# Altium PCB usomiq-audio-cape.PcbDoc
Units mm, origin at the board's own origin, x right, y up, seen from the top; angles counter-clockwise.
Board outline 54.61 x 86.36 mm, 2 copper layers (Top Layer, Bottom Layer); 57 components, 43 nets, 265 pads, 69 vias.
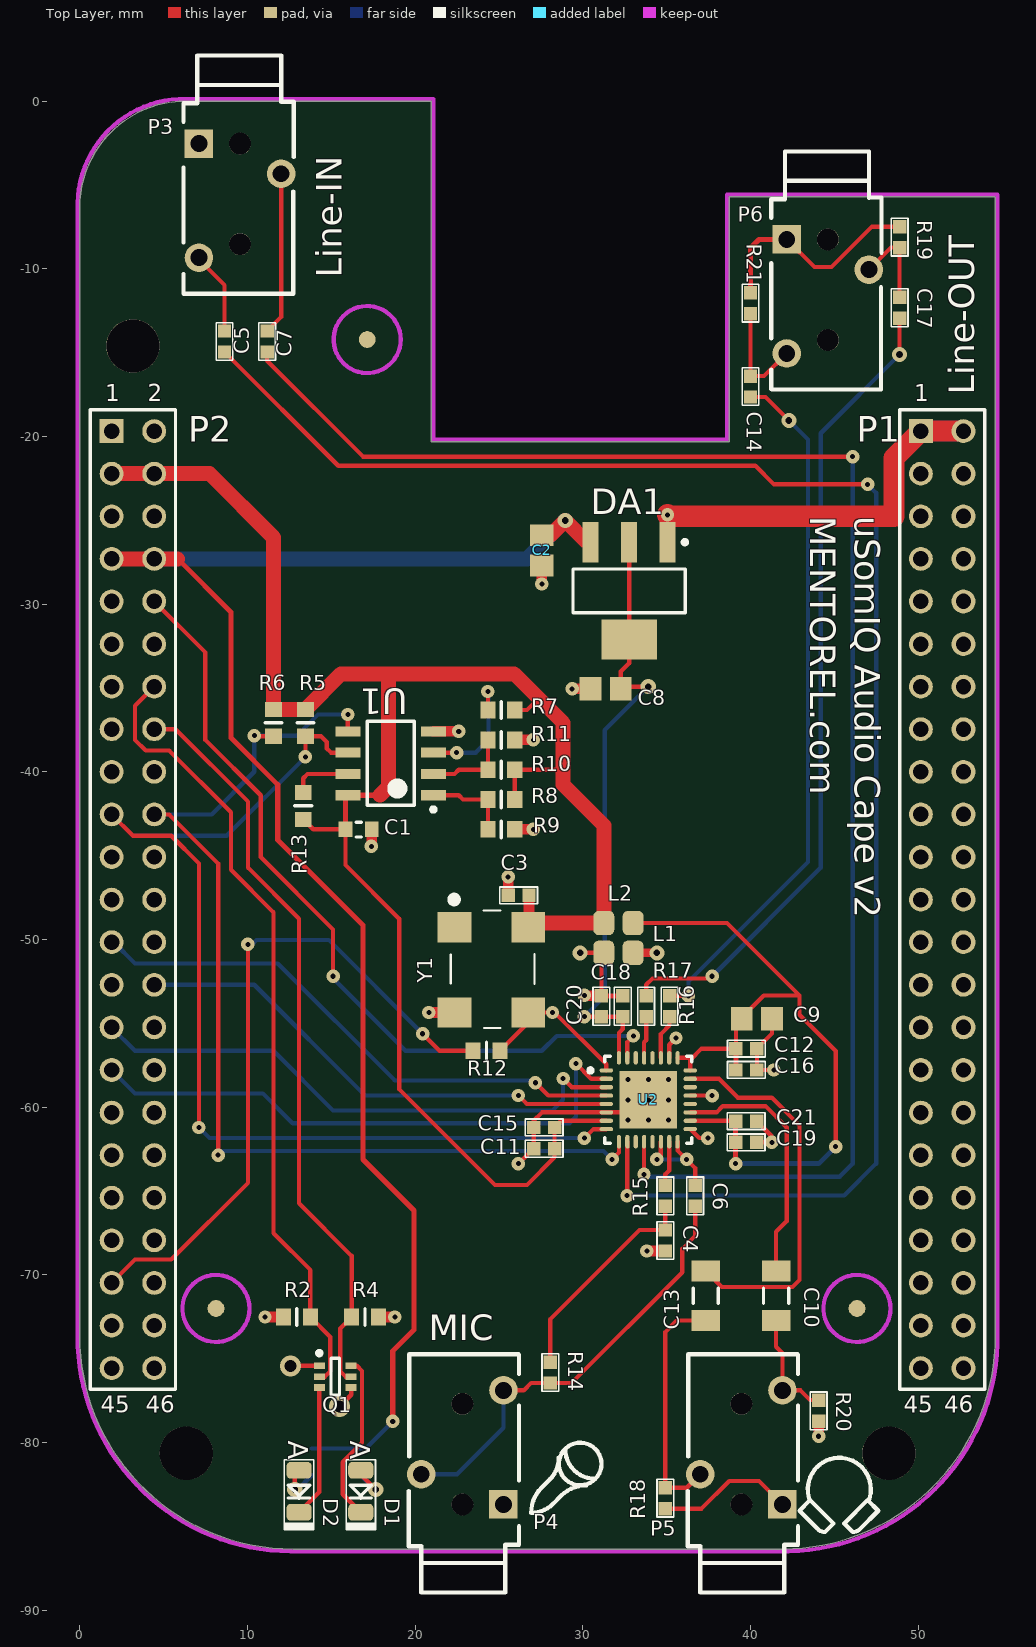
[diagram p0: Top Layer view]
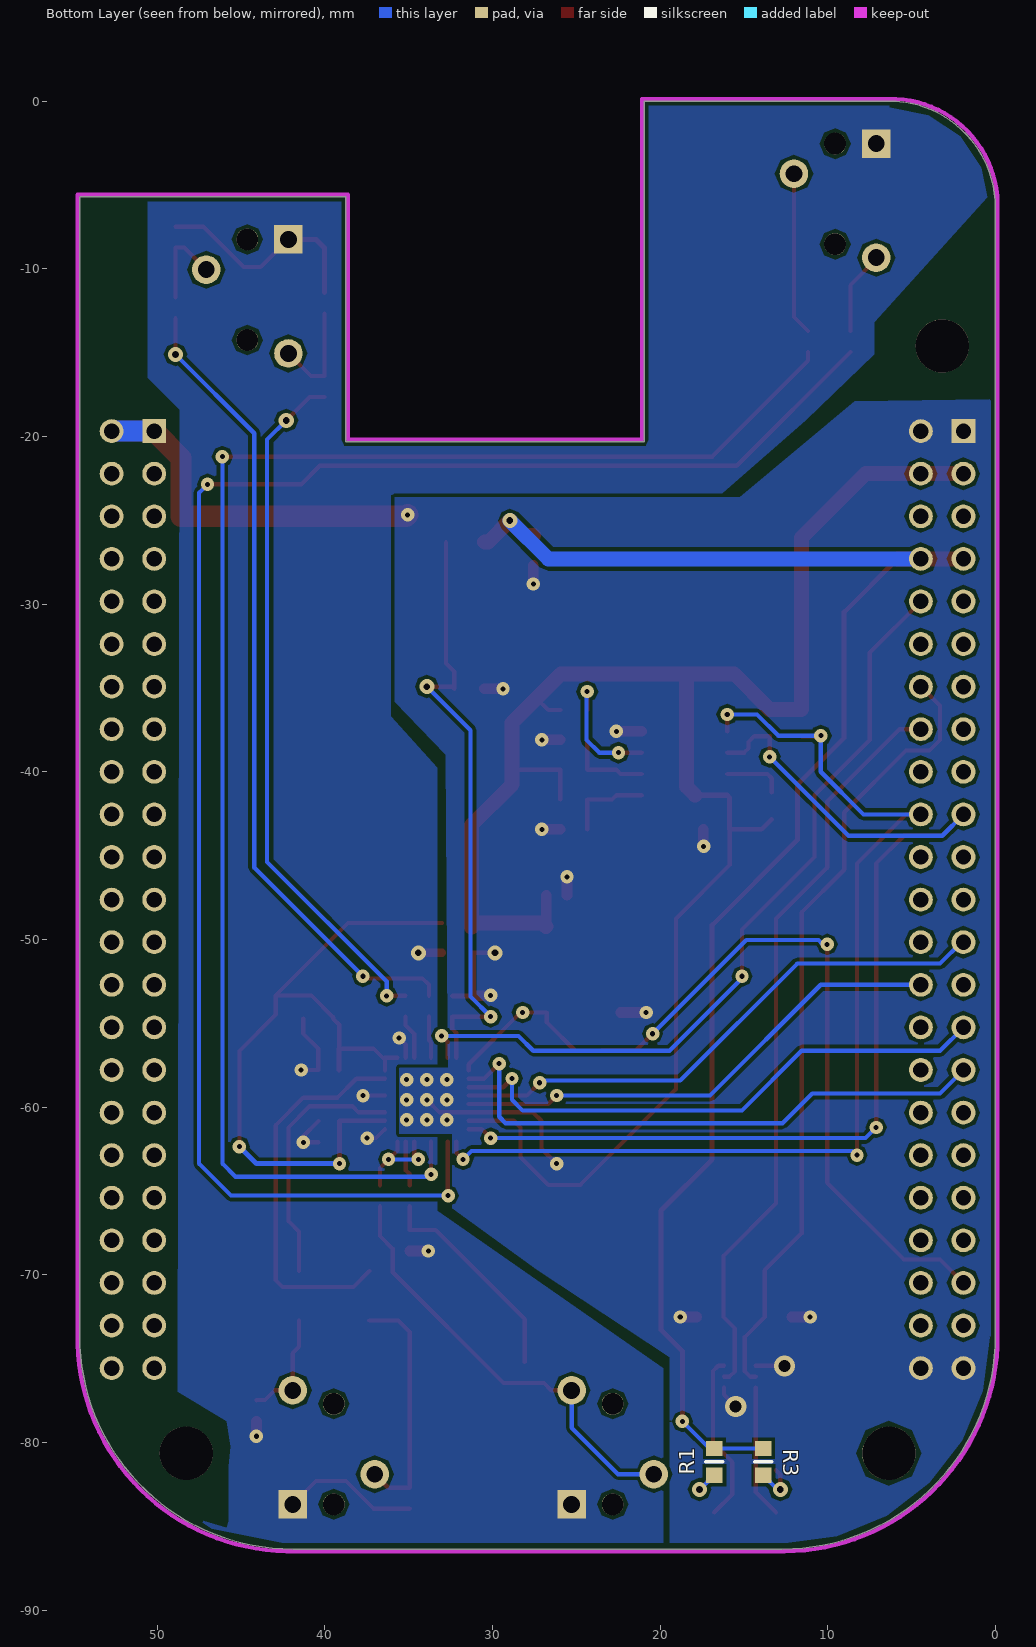
[diagram p1: Bottom Layer view, seen from below]
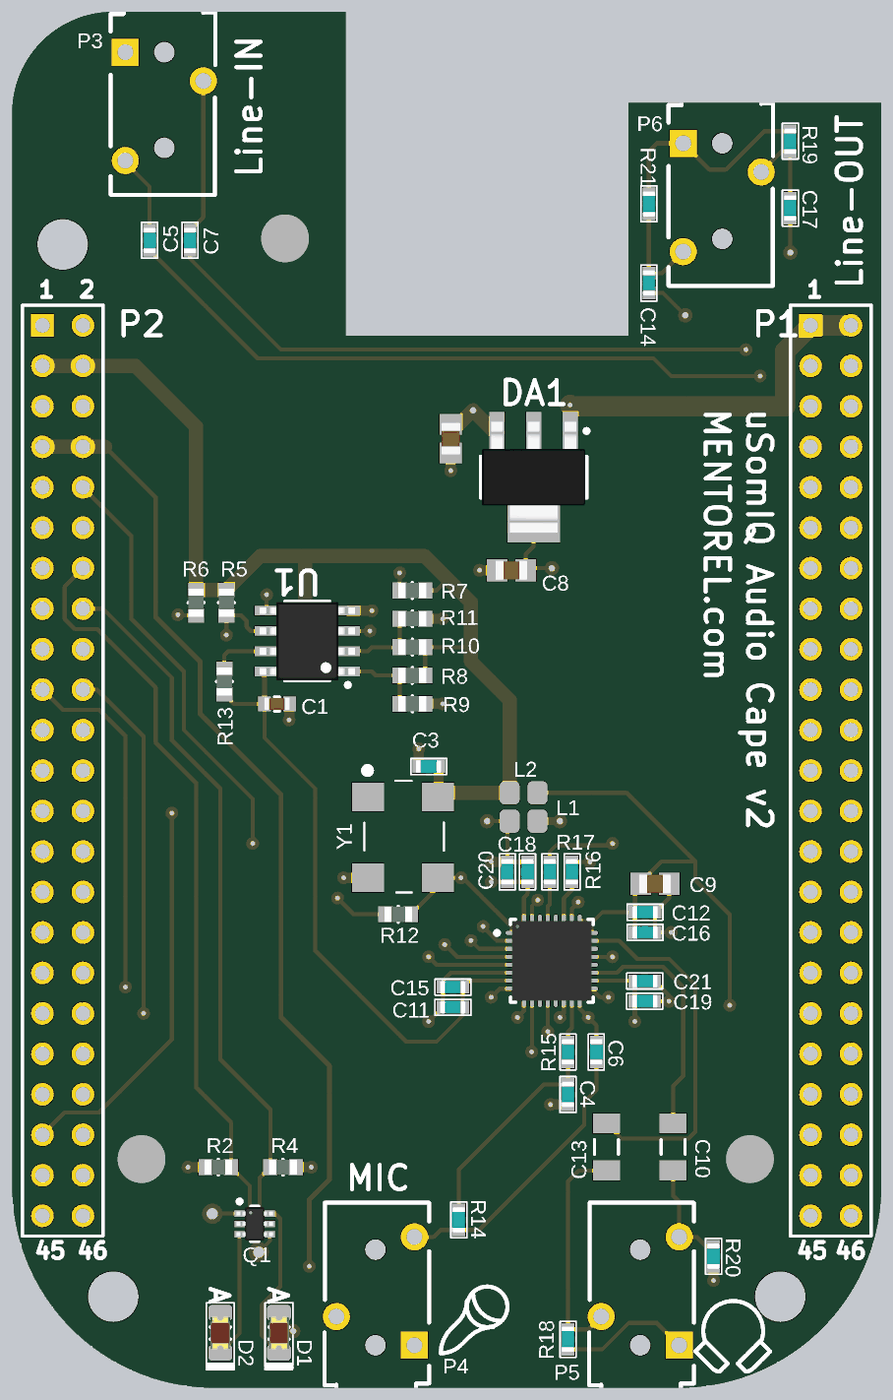
[diagram p2: 3D render of the assembled board from above, using the file's embedded part models]

## Layer stack, top to bottom
Top Layer: signal copper 0.0356
Dielectric: dielectric 0.32, FR-4, Dk 4.8
Bottom Layer: signal copper 0.0356

## Board outline
12.7,-86.36 cw(c12.7,-73.66) 0,-73.66 0,-6.35 cw(c6.35,-6.35) 6.35,0 20.955,0 20.955,-20.32 38.735,-20.32 38.735,-5.715 54.61,-5.715 54.61,-73.66 cw(c41.91,-73.66) 41.91,-86.36

## Design rules (kind name [scope] priority, off if disabled: settings)
Clearance Clearance_1 [InPolygon vs OnLayer('Keep-Out Layer')] p1: gap=0.25
Clearance [All] p2: gap=0.2
HoleSize [All] p1: absolutevalues=TRUE maxlimit=12.54 minlimit=0.025 maxpercent=80.000 minpercent=20.000
MinimumSolderMaskSliver [All] p1: minsoldermaskwidth=0
PlaneClearance [All] p1: clearance=0.254
PlaneConnect [All] p1: planeconnectstyle=Direct reliefexpansion=0.508 reliefentries=4 reliefconductorwidth=0.254 reliefairgap=0.254
PolygonConnect [All] p1: connectstyle=Direct reliefconductorwidth=0.254 reliefentries=4 polygonreliefangle="90 Angle" airgapwidth=0.254
RoutingVias [All] p1: holewidth=0.3 width=0.8 viastyle="Through Hole" minholewidth=0.3 minwidth=0.61 maxholewidth=0.711 maxwidth=1.27
SilkToSilkClearance [All] p1: silktosilkclearance=0.05
SilkscreenOverComponentPads [IsPad] p1: minsilkscreentomaskgap=0.01
SolderMaskExpansion [All] p1: expansion=0.05
Width [All] p1: maxlimit=1.27 minlimit=0.254 preferedwidth=0.254
22 further rules are at their usual default settings.

## Classes and differential pairs
component class bone_capes: C1 D1 D2 P1 P2 Q1 R1 R2 R3 R4 R5 R6 R7 R8 R9 R10 R11 R12 R13 U1
component class audio: C2 C3 C4 C5 C6 C7 C8 C9 C10 C11 C12 C13 C14 C15 C16 C17 C18 C19 C20 C21 DA1 L1 L2 P3 P4 P5 P6 R14 R15 R16 R17 R18 R19 R20 R21 U2 Y1

## Components (designator, comment, footprint, x,y, rotation, side; value= is the part's Value field where it differs from the comment)
C1 "C0603" CC1608-0603 16.637,-43.434 r0 top
C2 "C0805" CC2012-0805 27.559,-26.797 r90 top
C3 "C0603" CHIP0603 26.797,-47.371 r180 top
C4 "C0603" CHIP0603 34.925,-68.58 r90 top
C5 "C0603" CHIP0603 8.636,-13.716 r270 top
C6 "C0603" CHIP0603 36.703,-65.913 r90 top
C7 "C0603" CHIP0603 11.176,-13.716 r270 top
C8 "C0805" CC2012-0805 31.369,-35.052 r0 top
C9 "C0805" CC2012-0805 40.386,-54.737 r180 top
C10 "C1206" CC3216-1206 41.529,-71.247 r90 top
C11 "C0603" CHIP0603 28.321,-62.484 r180 top
C12 "C0603" CHIP0603 39.136,-56.515 r0 top
C13 "C1206" CC3216-1206 37.338,-71.247 r90 top
C14 "C0603" CHIP0603 40.005,-17.653 r90 top
C15 "C0603" CHIP0603 28.321,-61.214 r180 top
C16 "C0603" CHIP0603 39.136,-57.785 r0 top
C17 "C0603" CHIP0603 48.895,-12.954 r90 top
C18 "C0603" CHIP0603 32.385,-54.61 r90 top
C19 "C0603" CHIP0603 39.116,-62.103 r0 top
C20 "C0603" CHIP0603 31.115,-54.61 r90 top
C21 "C0603" CHIP0603 39.116,-60.833 r0 top
D1 "LED0805" LED0805 16.764,-81.661 r270 top
D2 "LED0805" LED0805 13.081,-81.661 r270 top
DA1 "LM1117" SOT230P700X160-4N 32.766,-29.21 r270 top
L1 "BLM21PG221SN1D" Chip2PinSM127P600-8N 32.131,-50.8 r0 top
L2 "BLM21PG221SN1D" Chip2PinSM127P600-8N 32.131,-49.022 r0 top
P1 "HDR_46_F_2_0.1_0.1" DIP46 50.165,-19.685 r0 top
P2 "HDR_46_F_2_0.1_0.1" DIP46 1.905,-19.685 r0 top
P3 "AUB-13" AUB_13 7.112,-2.54 r90 top
P4 "AUB-13" AUB_13 25.273,-83.693 r270 top
P5 "AUB-13" AUB_13 41.91,-83.693 r270 top
P6 "AUB-13" AUB_13 42.164,-8.255 r90 top
Q1 "RN1907" SOT363-6L 15.24,-76.073 r0 top
R1 "R0603" RESC1608X55N 16.764,-81.153 r90 bottom
R2 "R0603" RESC1608X55N 12.954,-72.517 r0 top
R3 "R0603" RESC1608X55N 13.843,-81.153 r90 bottom
R4 "R0603" RESC1608X55N 17.018,-72.517 r180 top
R5 "R0603" RESC1608X55N 13.462,-37.084 r90 top
R6 "R0603" RESC1608X55N 11.557,-37.084 r90 top
R7 "R0603" RESC1608X55N 25.146,-36.322 r0 top
R8 "R0603" RESC1608X55N 25.146,-41.656 r0 top
R9 "R0603" RESC1608X55N 25.146,-43.434 r180 top
R10 "R0603" RESC1608X55N 25.146,-39.878 r0 top
R11 "R0603" RESC1608X55N 25.146,-38.1 r180 top
R12 "R0603" RESC1608X55N 24.257,-56.642 r180 top
R13 "R0603" RESC1608X55N 13.335,-42.037 r270 top
R14 "R0603" CHIP0603 28.067,-76.454 r90 top
R15 "R0603" CHIP0603 34.925,-65.913 r90 top
R16 "R0603" CHIP0603 35.179,-54.61 r90 top
R17 "R0603" CHIP0603 33.782,-54.61 r90 top
R18 "R0603" CHIP0603 34.925,-83.947 r90 top
R19 "R0603" CHIP0603 48.895,-7.493 r270 top
R20 "R0603" CHIP0603 44.069,-78.74 r90 top
R21 "R0603" CHIP0603 40.005,-11.43 r270 top
U1 "CAT24C256" SOIC127P600X173-8L 18.542,-39.497 r180 top
U2 "TLV320AIC3104" QFN32 33.909,-59.563 r0 top
Y1 "KXO-V97" KXO_V97 22.352,-49.276 r270 top

## Footprints (in the part's own frame and the unit in brackets; to place one, negate y for a bottom-side part, rotate by r counter-clockwise, add the part's x,y. Pads: shape width x height; smd on the part's side, far side on the other; paste and mask are expansions set on the pad)
AUB_13 [mm] "3.5mm audio jack, PTH on pcb, 3 contacts"
  round 1.3 hole 1.3 unplated: 0(-6,-2.45) 0(0,-2.45)
  rect 1.7x1.7 hole 1: 1(0,0)
  round 1.7 hole 1: 2(-1.8,-4.9) 3(-6.8,0)
  silkscreen extent -8.95,-5.65 5.25,0.92, body extent -8.72,-5.38 5.2,0.6, height 5
CC1608-0603 [mil] "Chip Capacitor, 2-Leads, Body 1,6x0,8mm, IPC Medium Density"
  rect 32x36 smd: 1(-31,0) 2(31,0)
  silkscreen extent -6,-18 6,17, body extent -31,-16 32,16, height 31
CC2012-0805 [mm] "Chip Capacitor, 2-Leads, Body 2,0x1,25mm, IPC Medium Density"
  rect 1.3x1.4 smd: 1(-0.9,0) 2(0.9,0)
  body extent -1,-0.6 1,0.6, height 1.2
CC3216-1206 [mm] "Chip Capacitor, 2-Leads, Body 3,2x1,6mm, IPC Medium Density"
  rect 1.25x1.7 smd: 1(-1.475,0) 2(1.475,0)
  silkscreen extent -0.45,-0.75 0.45,0.75, body extent -1.7,-0.82 1.7,0.82, height 0.7
Chip2PinSM127P600-8N [mm]
  rrect50% 1.25x1.45 smd: 1(-0.875,0) 2(0.875,0)
  body extent -1.1,-0.72 1.1,0.72, height 1.05
CHIP0603 [mm]
  rect 0.8x0.8 smd: 1(0,0) 2(1.25,0)
  silkscreen extent -0.5,-0.5 1.75,0.5, body extent -0.53,-0.5 1.75,0.51, height 0.95
DIP46 [mm]
  rect 1.42x1.42 hole 0.92: 1(0,0)
  round 1.42 hole 0.92: 2(2.54,0) 3(0,-2.54) 4(2.54,-2.54) 5(0,-5.08) 6(2.54,-5.08) 7(0,-7.62) 8(2.54,-7.62) 9(0,-10.16) 10(2.54,-10.16) 11(0,-12.7) 12(2.54,-12.7) 13(0,-15.24) 14(2.54,-15.24) 15(0,-17.78) 16(2.54,-17.78) 17(0,-20.32) 18(2.54,-20.32) 19(0,-22.86) 20(2.54,-22.86) 21(0,-25.4) 22(2.54,-25.4) 23(0,-27.94) 24(2.54,-27.94) 25(0,-30.48) 26(2.54,-30.48) 27(0,-33.02) 28(2.54,-33.02) 29(0,-35.56) 30(2.54,-35.56) 31(0,-38.1) 32(2.54,-38.1) 33(0,-40.64) 34(2.54,-40.64) 35(0,-43.18) 36(2.54,-43.18) 37(0,-45.72) 38(2.54,-45.72) 39(0,-48.26) 40(2.54,-48.26) 41(0,-50.8) 42(2.54,-50.8) 43(0,-53.34) 44(2.54,-53.34) 45(0,-55.88) 46(2.54,-55.88)
  silkscreen extent -1.27,-57.15 3.81,1.27, body extent -1.27,-57.15 3.81,1.27, height 8.51
KXO_V97 [mm]
  rect 1.8x2 smd: 1(0,0) 2(5.08,0) 3(5.08,4.4) 4(0,4.4)
  silkscreen extent -1.86,-0.23 6,4.77, body extent -1,-0.22 6,4.78, height 1.3
LED0805 [mm]
  rrect50% 1x1.5 smd: 1(0,0) 2(2.5,0)
  silkscreen extent -0.63,-0.87 3.55,0.87, body extent -0.64,-0.89 3.17,0.89, height 1.1
QFN32 [mm] "32-Pin Quad Flat No-Lead 0.5 mm Pitch, IPC Medium Density"
  oval 0.8x0.25 smd: 1(-2.5,1.75) 2(-2.5,1.25) 3(-2.5,0.75) 4(-2.5,0.25) 5(-2.5,-0.25) 6(-2.5,-0.75) 7(-2.5,-1.25) 8(-2.5,-1.75) 17(2.5,-1.75) 18(2.5,-1.25) 19(2.5,-0.75) 20(2.5,-0.25) 21(2.5,0.25) 22(2.5,0.75) 23(2.5,1.25) 24(2.5,1.75)
  oval 0.25x0.8 smd: 9(-1.75,-2.5) 10(-1.25,-2.5) 11(-0.75,-2.5) 12(-0.25,-2.5) 13(0.25,-2.5) 14(0.75,-2.5) 15(1.25,-2.5) 16(1.75,-2.5) 25(1.75,2.5) 26(1.25,2.5) 27(0.75,2.5) 28(0.25,2.5) 29(-0.25,2.5) 30(-0.75,2.5) 31(-1.25,2.5) 32(-1.75,2.5)
  rect 3.45x3.45 smd: 33(0,0)
  silkscreen extent -3.57,-2.6 2.6,2.6, body extent -2.51,-2.51 2.51,2.51, height 0.8
RESC1608X55N [mm] "Chip Resistor, EIA 0603, Metric 1608, Body 1.6x0.8mm, IPC Medium Density"
  rect 0.9x1 smd: 1(-0.8,0) 2(0.8,0)
  silkscreen extent 0,-0.5 0,0.5, body extent -0.87,-0.47 0.88,0.48, height 0.55
SOIC127P600X173-8L [mm] "SOIC, 8-Leads, Body 5,0x4,0mm (max), Pitch 1,27mm, IPC High Density"
  rect 1.5x0.6 smd: 1(-2.55,1.905) 2(-2.55,0.635) 3(-2.55,-0.635) 4(-2.55,-1.905) 5(2.55,-1.905) 6(2.55,-0.635) 7(2.55,0.635) 8(2.55,1.905)
  silkscreen extent -2.68,-2.5 1.4,2.88, body extent -3,-2.49 3,2.49, height 1.75
SOT230P700X160-4N [mm] "SOT223, 4-Leads, Body 6,7x7,3mm (max), Pitch 2,30mm, IPC Medium Density"
  rect 2.4x0.95 smd: 1(-2.9,2.3) 2(-2.9,0) 3(-2.9,-2.3)
  rect 2.4x3.3 smd: 4(2.9,0)
  silkscreen extent -3.02,-3.35 1.3,3.45, body extent -3.48,-3.35 3.48,3.35, height 1.7
SOT363-6L [mm] "SOT363, 6-Leads, Body 2x1.3mm, Pitch 0.65mm, Lead Span 2.1mm, IPC High Density"
  rect 0.65x0.4 smd: 1(-0.95,0.65) 2(-0.95,0) 3(-0.95,-0.65) 4(0.95,-0.65) 5(0.95,0) 6(0.95,0.65)
  silkscreen extent -1.07,-1.1 0.25,1.52, body extent -1.15,-1.1 1.15,1.1, height 1

## Part data
C3 C4 C5 C6 C7 C11 C12 C14 C15 C16 C17 C18 C19 C20 C21: "Ceramic capacitor C0603"
D1 D2: "LED 0805"
DA1: "800mA Low-Dropout Linear Regulator"
P1 P2: "NN HEADER FMAL 46PS.1\" DL GOLD"
P3 P4 P5 P6: "Audio connector mini-jack 3.5mm, 3 pins"
Q1: "Transistor Silicon NPN"
R14 R15 R16 R17 R18 R19 R20 R21: "Resistor 0603"
U1: "256 kb I2C CMOS Serial  EEPROM"
U2: "LOW-POWER STEREO AUDIO CODEC FOR PORTABLE AUDIO/TELEPHONY"
Y1: "Quartz oscillator 7x5mm"

## Free pads (board coordinates)
  round 3.175 hole 3.175 unplated: 0(3.175,-14.605) 0(6.35,-80.645) 0(48.26,-80.645)
  round 1 smd paste+1: GF(8.128,-72.009) GF(17.145,-14.224) GF(46.355,-72.009)

## Via types
v1: diameter 0.8, hole 0.3, Top Layer to Bottom Layer, tented both sides, 59 vias
v2: diameter 0.9, hole 0.4, Top Layer to Bottom Layer, tented both sides, 8 vias
v3: diameter 1.27, hole 0.711, Top Layer to Bottom Layer, tented both sides, 2 vias

## Nets (pads, with @x,y where several pads share a name; then routed paths per layer and width w, separated by ;. In a path a pad name is that pad's centre, name@x,y a point inside that pad or via, vN(x,y) a via of type N, cw(c..) or ccw(c..) an arc to the next point about the centre after c; other vN are vias at no path point)
5VDC: C2.2 DA1.3 P2.7 P2.8 R1.2 R3.2 | length 96.5
  Top Layer w0.3: 5.842,-27.305 9.017,-30.48 9.017,-37.973 11.811,-40.767 11.811,-44.069 16.891,-49.149 16.891,-63.119 19.939,-66.167 19.939,-73.279 18.669,-74.549 v1(18.669,-78.74)
  Top Layer w0.889: P2.7 P2.8 5.842,-27.305 ; C2.2 28.078,-25.897 v2(28.956,-25.019) 30.247,-26.31 DA1.3
  Bottom Layer w0.254: R3.2 R1.2 17.056,-80.353 v1(18.669,-78.74)
  Bottom Layer w0.889: P2.8 26.67,-27.305 v2(28.956,-25.019)
AGND: C4.1 C9.1 C12.2 C16.2 C19.2 C21.2 L1.2 P3.1 P4.1 P5.1 P6.1 R18.1 R19.1 R20.1 R21.1 U2.17 U2.21 U2.26 | length 36
  Top Layer w0.254: R18.1 37.084,-83.947 38.735,-82.296 40.513,-82.296 P5.1 ; U2.26 35.159,-56.281 v1(35.56,-55.88) ; U2.17 36.945,-61.849 v1(37.465,-61.849) ; U2.21 v1(37.715,-59.313) ; C19.2 v1(41.275,-62.103) 41.275,-61.742 C21.2 ; C9.1 41.286,-55.615 C12.2 C16.2 v1(41.402,-57.785) ; P6.1 43.815,-9.906 44.831,-9.906 47.244,-7.493 R19.1
  Top Layer w0.3: R21.1 40.005,-8.763 40.513,-8.255 P6.1
  Top Layer w0.5: L1.2 v2(34.417,-50.8)
  Top Layer w0.635: v1(33.82,-68.58) C4.1 ; v1(44.069,-79.629) R20.1
AIC_1V8: C8.2 C18.1 C20.1 DA1.2 DA1.4 U2.32 | length 36.7
  Top Layer w0.254: v1(30.099,-54.61) C20.1 C18.1 32.385,-55.346 32.159,-55.572 U2.32 ; DA1.2 DA1.4 32.766,-33.528 32.269,-34.025 C8.2 32.396,-34.925 v2(33.909,-34.925)
  Bottom Layer w0.254: v1(30.099,-54.61) 31.305,-53.404 31.305,-37.529 v2(33.909,-34.925)
AUD_BCLK: P2.31 U2.2 | length 34.5
  Top Layer w0.254: v1(29.591,-57.404) 30.5,-58.313 U2.2
  Bottom Layer w0.254: P2.31 3.302,-59.182 10.922,-59.182 12.7,-60.96 29.21,-60.96 29.591,-60.579 v1(29.591,-57.404)
AUD_DIN: P2.25 U2.4 | length 33.2
  Top Layer w0.254: v1(27.178,-58.547) 27.944,-59.313 U2.4
  Bottom Layer w0.254: P2.25 2.032,-50.165 3.302,-51.435 11.811,-51.435 18.796,-58.42 v1@27.178,-58.42
AUD_DOUT: P2.28 U2.5 | length 29.9
  Top Layer w0.254: v1(26.162,-59.309) 26.666,-59.813 U2.5
  Bottom Layer w0.254: P2.28 10.414,-52.705 17.018,-59.309 v1(26.162,-59.309)
AUD_FSX: P2.29 U2.3 | length 33.2
  Top Layer w0.254: v1@28.892,-58.356 29.349,-58.813 U2.3
  Bottom Layer w0.254: P2.29 3.302,-56.642 11.557,-56.642 15.113,-60.198 28.194,-60.198 28.829,-59.563 v1(28.829,-58.293)
AUD_MCLK: R12.1 U2.1 Y1.3 | length 9.3
  Top Layer w0.254: R12.1 26.752,-54.947 Y1.3 v1(28.194,-54.356) 28.321,-54.356 31.409,-57.444 U2.1
AVDD: C9.2 C12.1 C16.1 C19.1 C21.1 L2.2 U2.18 U2.24 U2.25 | length 44.9
  Top Layer w0.254: L2.2 38.608,-49.022 42.926,-53.34 ; U2.25 36.409,-57.063 ; U2.18 39.096,-60.813 C21.1 ; U2.24 36.409,-57.19 37.084,-56.515 C12.1 39.136,-55.087 C9.2 39.486,-54.648 40.794,-53.34 42.926,-53.34 ; v1(45.085,-62.357) 45.085,-56.647 42.926,-54.488 42.926,-53.34
  Top Layer w0.3: v1(39.116,-63.373) C19.1 C21.1 ; C16.1 C12.1
  Bottom Layer w0.3: v1(39.116,-63.373) 44.069,-63.373 v1(45.085,-62.357)
DGND: C1.2 C2.1 C3.2 C8.1 C11.2 C15.2 C18.2 C20.2 DA1.1 L1.1 P1.1 P1.2 P2.1 P2.2 P2.45 P2.46 Q1.1 Q1.4 R2.1 R4.1 R9.1 R11.1 U1.4 U2.6 U2.33 Y1.2 | length 55.7
  Top Layer w0.254: v3(12.573,-75.438) 12.588,-75.423 Q1.1 ; v3(15.494,-77.851) 16.19,-77.155 Q1.4 ; v1(26.162,-63.373) 26.182,-63.373 C11.2 C15.2 27.071,-60.813 27.571,-60.313 U2.6 33.159,-60.313 v1(33.909,-59.563) ; v2(29.845,-50.8) L1.1 31.115,-50.941 C20.2
  Top Layer w0.3: C20.2 C18.2
  Top Layer w0.635: v1(11.049,-72.517) R2.1 ; v1@17.424,-44.361 C1.2 ; R4.1 v1(18.796,-72.517) ; v1(20.828,-54.356) Y1.2 ; U1.4 v1(22.606,-37.592) ; C3.2 v1(25.547,-46.266) ; R9.1 v1(27.051,-43.434) ; R11.1 v1(27.051,-38.1) ; v1(27.559,-28.802) C2.1 ; v1(29.364,-35.052) C8.1 ; v1@30.119,-53.36 C20.2
  Top Layer w1.27: v1(35.052,-24.676) 35.141,-24.765 48.566,-24.765 48.566,-21.284 P1.1 P1.2
  Bottom Layer w1.27: P1.1 P1.2
  other v1: 32.709,-60.763 33.909,-60.763 35.109,-60.763 32.709,-59.563 35.109,-59.563 32.709,-58.363 33.909,-58.363 35.109,-58.363 30.099,-53.34 17.399,-44.45
HPLO: C10.2 U2.19 | length 15.3
  Top Layer w0.254: U2.19 37.985,-60.313 38.354,-59.944 40.894,-59.944 42.164,-61.214 42.164,-66.802 41.529,-67.437 C10.2
HPLOUT: C10.1 P5.3 R20.2 | length 6.7
  Top Layer w0.254: C10.1 41.529,-74.295 41.91,-74.676 P5.3 42.984,-76.893 43.561,-77.47 44.049,-77.47 R20.2
HPRO: C13.2 U2.23 | length 23
  Top Layer w0.254: U2.23 38.12,-58.313 39.243,-59.436 41.275,-59.436 42.926,-61.087 42.926,-70.312 42.514,-70.724 38.29,-70.724 C13.2
HPROUT: C13.1 P5.2 R18.2 | length 14.4
  Top Layer w0.254: P5.2 36.206,-82.697 R18.2 34.925,-73.406 35.609,-72.722 C13.1
I2C2_SCL: P2.19 R5.1 U1.6 U2.8 | length 65.4
  Top Layer w0.254: P2.19 3.175,-43.815 5.461,-43.815 7.112,-45.466 v1(7.112,-61.214) ; v1(13.462,-39.116) R5.1 14.389,-37.884 14.732,-38.227 14.732,-38.608 14.986,-38.862 U1.6 ; v1(30.099,-61.849) 30.635,-61.313 U2.8
  Bottom Layer w0.254: P2.19 3.175,-43.815 8.763,-43.815 v1(13.462,-39.116) ; v1(7.112,-61.214) 7.747,-61.849 v1(30.099,-61.849)
I2C2_SDA: P2.20 R6.1 U1.5 U2.9 | length 64.9
  Top Layer w0.254: P2.20 5.334,-42.545 8.255,-45.466 v1(8.255,-62.865) ; v1@10.414,-37.884 R6.1 ; U1.5 v1(15.992,-36.586) ; v1(31.75,-63.119) 32.159,-62.71 U2.9
  Bottom Layer w0.254: P2.20 7.874,-42.545 10.414,-40.005 v1(10.414,-37.846) 12.954,-37.846 14.214,-36.586 v1(15.992,-36.586) ; v1(8.255,-62.865) 8.509,-62.611 31.242,-62.611 v1(31.75,-63.119)
NetC4_2: C4.2 R14.2 R15.1 | length 13
  Top Layer w0.254: R14.2 28.067,-72.644 33.381,-67.33 C4.2 R15.1
NetC5_1: C5.1 P3.3 | length 5
  Top Layer w0.254: P3.3@7.054,-9.398 8.636,-10.98 C5.1
NetC5_2: C5.2 U2.10 | length 101.2
  Top Layer w0.254: C5.2 15.423,-21.753 40.295,-21.753 41.402,-22.86 v1(46.99,-22.86) ; v1@32.659,-65.278 U2.10
  Bottom Layer w0.254: v1(32.639,-65.278) 45.593,-65.278 47.498,-63.373 47.498,-23.368 v1(46.99,-22.86)
NetC6_1: C6.1 P4.2 P4.3 R14.1 | length 26.1
  Top Layer w0.254: P4.3 26.485,-76.893 26.924,-76.454 R14.1 29.337,-76.454 35.941,-69.85 35.941,-68.453 36.703,-67.691 C6.1
  Bottom Layer w0.254: P4.2 22.501,-81.893 25.273,-79.121 P4.3
NetC6_2: C6.2 U2.14 U2.16 | length 6
  Top Layer w0.254: v1(34.417,-63.119) 34.659,-62.877 U2.14 ; U2.16 35.659,-62.583 v1(36.195,-63.119) 36.703,-63.627 C6.2
  Bottom Layer w0.254: v1(34.417,-63.119) v1(36.195,-63.119)
NetC7_1: C7.1 P3.2 | length 9.7
  Top Layer w0.254: C7.1 12.012,-12.88 P3.2
NetC7_2: C7.2 U2.12 | length 94.8
  Top Layer w0.254: C7.2 11.176,-15.494 16.891,-21.209 v1(46.101,-21.209) ; v1@33.659,-64.008 U2.12
  Bottom Layer w0.254: v1(33.655,-64.008) 33.801,-64.154 45.32,-64.154 46.101,-63.373 v1(46.101,-21.209)
NetC14_1: C14.1 R16.2 | length 41.8
  Top Layer w0.254: R16.2 v1(36.302,-53.36) v1@36.322,-53.34 ; C14.1 40.894,-17.653 v2(42.291,-19.05)
  Bottom Layer w0.254: v1(36.302,-53.36) 36.302,-52.509 43.434,-45.377 43.434,-20.193 v2(42.291,-19.05)
NetC14_2: C14.2 P6.3 R21.2 | length 6.4
  Top Layer w0.254: R21.2 C14.2 40.816,-16.403 P6.3
NetC17_1: C17.1 R17.2 | length 48.7
  Top Layer w0.254: R17.2 33.782,-52.705 34.163,-52.324 37.592,-52.324 v1(37.719,-52.197) ; v2(48.895,-15.113) C17.1
  Bottom Layer w0.254: v1(37.719,-52.197) 44.196,-45.72 44.196,-19.812 v2(48.895,-15.113)
NetC17_2: C17.2 P6.2 R19.2 | length 5.3
  Top Layer w0.254: P6.2 48.376,-8.743 R19.2 C17.2
NetD1_1: D1.1 R1.1 | length 2.8
  Top Layer w0.254: D1.1 16.764,-81.915 v2(17.653,-82.804)
  Bottom Layer w0.254: R1.1 17.615,-82.804 v2(17.653,-82.804)
NetD1_2: D1.2 Q1.6 | length 10.1
  Top Layer w0.254: Q1.6 16.527,-75.423 16.842,-75.738 16.842,-80.017 15.687,-81.172 15.687,-83.084 D1.2
NetD2_1: D2.1 R3.1 | length 2.6
  Top Layer w0.254: v2(12.827,-82.804) 12.827,-81.915 D2.1
  Bottom Layer w0.254: v2(12.827,-82.804) 12.992,-82.804 R3.1
NetD2_2: D2.2 Q1.3 | length 7.9
  Top Layer w0.254: D2.2 14.29,-82.952 Q1.3
NetP2_41: P2.41 R12.2 | length 41.1
  Top Layer w0.254: P2.41 3.302,-69.088 5.461,-69.088 10.033,-64.516 v1(10.033,-50.292) ; v1(20.447,-55.626) 21.463,-56.642 R12.2
  Bottom Layer w0.254: v1(10.033,-50.292) 10.293,-50.292 10.547,-50.038 14.859,-50.038 v1(20.447,-55.626)
NetR7_1: R7.1 U1.3 | length 7.7
  Top Layer w0.254: U1.3 v1(22.479,-38.862) ; R7.1 v1(24.346,-35.217) v1@24.384,-35.179
  Bottom Layer w0.254: v1(22.479,-38.862) 23.622,-38.862 24.384,-38.1 v1@24.384,-35.179
NetR8_1: R8.1 R9.2 U1.1 | length 5.1
  Top Layer w0.254: U1.1 22.606,-41.402 22.86,-41.656 R8.1 R9.2
NetR10_1: R10.1 R11.2 U1.2 | length 5.1
  Top Layer w0.254: U1.2 22.352,-40.132 22.606,-39.878 R10.1 R11.2
NetR13_1: R13.1 U1.7 | length 3.6
  Top Layer w0.254: R13.1 13.335,-40.386 13.589,-40.132 U1.7
NetR15_2: R15.2 U2.15 | length 2.7
  Top Layer w0.254: R15.2 34.925,-64.008 35.159,-63.774 U2.15
NetR16_1: R16.1 U2.27 | length 2.7
  Top Layer w0.254: U2.27 34.659,-55.638 35.179,-55.118 R16.1
NetR17_1: R17.1 U2.29 | length 2.5
  Top Layer w0.254: U2.29 33.659,-56.13 33.782,-56.007 R17.1
SYS_RESETN: P2.10 U2.31 | length 48.5
  Top Layer w0.254: P2.10 7.493,-32.893 7.493,-38.1 10.795,-41.402 10.795,-45.085 15.113,-49.403 v1(15.113,-52.197) ; U2.31 32.659,-56.114 v1(33.02,-55.753)
  Bottom Layer w0.254: v1@14.986,-52.197 19.431,-56.642 27.559,-56.642 28.448,-55.753 v1(33.02,-55.753)
USR0: P2.14 Q1.2 R2.2 | length 47.7
  Top Layer w0.254: P2.14 3.302,-36.068 3.302,-38.1 3.937,-38.735 5.334,-38.735 9.017,-42.418 9.017,-45.847 11.557,-48.387 11.557,-67.526 13.754,-69.723 R2.2 14.942,-73.705 14.942,-75.758 14.627,-76.073 Q1.2
USR1: P2.16 Q1.5 R4.2 | length 45
  Top Layer w0.254: P2.16 5.715,-37.465 10.033,-41.783 10.033,-45.72 13.081,-48.768 13.081,-65.735 16.218,-68.872 R4.2 15.538,-73.197 15.538,-75.758 15.853,-76.073 Q1.5
VCC_IO: C1.1 C3.1 C11.1 C15.1 L2.1 P2.3 P2.4 R5.2 R6.2 R7.2 R8.2 R10.2 R13.2 U1.8 U2.7 Y1.4 | length 115.1
  Top Layer w0.254: R13.2 13.932,-43.434 C1.1 15.85,-45.568 19.05,-48.768 19.05,-58.928 24.765,-64.643 26.67,-64.643 28.321,-62.992 C11.1 C15.1 28.722,-60.813 U2.7 ; R8.2 R10.2 28.829,-39.878 ; R7.2 26.67,-36.322 27.368,-35.623
  Top Layer w0.3: C1.1 U1.8@15.85,-41.544 ; U1.8 17.907,-41.402
  Top Layer w0.635: Y1.4@26.797,-49.231 C3.1
  Top Layer w0.889: P2.3 P2.4 7.747,-22.225 11.557,-26.035 R6.2 R5.2 15.583,-34.163 23.909,-34.163 25.908,-34.163 27.368,-35.623 28.829,-37.084 28.829,-39.878 28.829,-40.767 31.256,-43.194 L2.1 L2.1@30.988,-49.022 ; 17.907,-41.402 18.415,-40.894 18.415,-34.163 ; Y1.4@26.797,-49.231 27.006,-49.022 L2.1@30.988,-49.022 ; L2.1@31.242,-49.276 L2.1@30.988,-49.022
pads on no net: P1.3 P1.4 P1.5 P1.6 P1.7 P1.8 P1.9 P1.10 P1.11 P1.12 P1.13 P1.14 P1.15 P1.16 P1.17 P1.18 P1.19 P1.20 P1.21 P1.22 P1.23 P1.24 P1.25 P1.26 P1.27 P1.28 P1.29 P1.30 P1.31 P1.32 P1.33 P1.34 P1.35 P1.36 P1.37 P1.38 P1.39 P1.40 P1.41 P1.42 P1.43 P1.44 P1.45 P1.46 P2.5 P2.6 P2.9 P2.11 P2.12 P2.13 P2.15 P2.17 P2.18 P2.21 P2.22 P2.23 P2.24 P2.26 P2.27 P2.30 P2.32 P2.33 P2.34 P2.35 P2.36 P2.37 P2.38 P2.39 P2.40 P2.42 P2.43 P2.44 P3.0 P4.0 P5.0 P6.0 U2.11 U2.13 U2.20 U2.22 U2.28 U2.30 Y1.1

## Polygon pours and split planes (outlines as drawn)
AGND on Bottom Layer "Top Layer-No Net" (solid, remove dead copper, pour order 4): 0.127,-5.35 0.254,-4.715 0.508,-3.953 0.762,-3.445 1.143,-2.81 1.524,-2.302 2.032,-1.794 2.667,-1.286 3.048,-1.032 4.064,-0.524 4.953,-0.27 5.842,-0.143 20.828,-0.143 20.828,-20.59 38.862,-20.59 38.862,-5.985 50.546,-5.969 50.546,-16.51 48.641,-18.415 48.768,-76.962 45.847,-78.74 45.593,-80.264 45.72,-81.407 45.72,-84.709 45.847,-85.09 48.387,-84.344 47.244,-84.979 46.355,-85.36 45.593,-85.614 44.069,-85.995 19.812,-85.979 19.812,-75.565 33.274,-66.167 33.274,-39.751 36.068,-36.703 36.068,-23.495 16.383,-23.495 11.303,-19.05 7.239,-15.113 7.239,-13.208
DGND on Bottom Layer "Top Layer-No Net" (solid, remove dead copper, pour order 2): 8.382,-17.907 15.24,-23.622 35.814,-23.622 35.814,-35.814 32.766,-38.989 32.639,-57.658 35.56,-57.658 35.56,-61.595 32.385,-61.595 32.385,-66.04 27.305,-69.723 19.431,-74.93 19.431,-85.979 10.541,-85.979 9.398,-85.725 8.255,-85.344 6.604,-84.582 5.461,-83.82 4.826,-83.312 4.318,-82.931 3.429,-81.915 2.794,-81.28 2.413,-80.772 2.032,-80.01 1.651,-79.375 1.143,-78.359 0.889,-77.724 0.762,-77.343 0.508,-76.327 0.254,-74.041 0.254,-17.78

## Keep-outs
Top Layer:
  circle w0.254: c46.355,-72.009 r2
  circle w0.254: c8.128,-72.009 r2
  circle w0.254: c17.145,-14.224 r2
Keep-Out Layer:
  lines w0.254: -0.127,-73.66 ccw(c12.636,-73.724) 12.573,-86.487 42.291,-86.487 ccw(c42.037,-73.787) 54.737,-73.533 54.737,-5.588 38.608,-5.588 38.608,-20.193 21.082,-20.193 21.082,0.127 6.35,0.127 ccw(c6.223,-6.223) -0.127,-6.096 -0.127,-73.66

## Silkscreen, mask and mechanical layers (free items; w line width, h text height)
Top Overlay:
  circle w0.254: c29.845,-81.28 r1.27
  lines w0.254: 28.575,-80.899 cw(c26.735,-80.899) 28.036,-82.2 27.553,-82.683 ccw(c29.07,-84.201) 26.924,-84.201 ccw(c26.924,-82.361) 28.225,-83.662 28.708,-83.179 cw(c30.226,-84.696) 30.226,-82.55 ; 28.956,-80.391 ccw(c30.734,-80.391) 30.734,-82.169 ; 43.531,-83.426 cw(c45.302,-82.793) 47.058,-83.465 ; 42.926,-84.074 44.016,-85.164 ccw(c44.45,-84.731) 44.45,-85.344 44.958,-84.836 43.561,-83.439 42.926,-84.074 ; 45.593,-84.836 46.101,-85.344 ccw(c46.101,-84.731) 46.535,-85.164 47.625,-84.074 46.99,-83.439 45.593,-84.836
  text "Line-IN" at 15.621,-10.541 h1.52 r90
  text "Line-OUT" at 53.34,-17.526 h1.52 r90
  text "MENTOREL.com" at 43.561,-24.765 h1.52 r270
  text "uSomIQ Audio Cape v2" at 46.228,-24.765 h1.52 r270
  text "MIC" at 20.828,-73.914 h1.52
Mechanical 1:
  the board outline again, w0.254

## Dimensions
54.61,-5.715 to 41.91,-86.36 on Mechanical 1
6.35,0 to 12.7,-86.36 on Mechanical 1
0,-73.66 to 54.61,-73.66 on Mechanical 1
20.955,0 to 38.735,-5.715 on Mechanical 1
54.61,-5.715 to 38.735,-5.715 on Mechanical 1
20.955,0 to 20.955,-20.32 on Mechanical 1
38.735,-5.715 to 38.735,-20.32 on Mechanical 1
20.955,0 to 0,-6.35 on Mechanical 1
41.91,-73.66 to 60.113,-91.863 on Mechanical 1
12.7,-73.66 to -10.668,-83.82 on Mechanical 1
6.35,-6.35 to -13.208,2.159 on Mechanical 1

## Text inside footprints (layer, text, board x,y; h text height)
D1: Top Overlay "A" at 16.129,-79.883 h1.2 r270
D2: Top Overlay "A" at 12.446,-79.883 h1.2 r270
P1: Top Overlay "46" at 51.562,-78.232 h1; Top Overlay "45" at 49.149,-78.232 h1; Top Overlay "1" at 49.784,-17.907 h1
P2: Top Overlay "46" at 3.937,-78.232 h1; Top Overlay "45" at 1.27,-78.232 h1; Top Overlay "2" at 4.064,-17.907 h1; Top Overlay "1" at 1.524,-17.907 h1